# Altium PCB RM05-V1.7-sigle.PcbDoc
Units mm, origin at the board's own origin, x right, y up, seen from the top; angles counter-clockwise.
Board outline 152.4 x 101.6 mm, 2 copper layers (Top Layer, Bottom Layer); 42 components, 51 nets, 175 pads, 39 vias.
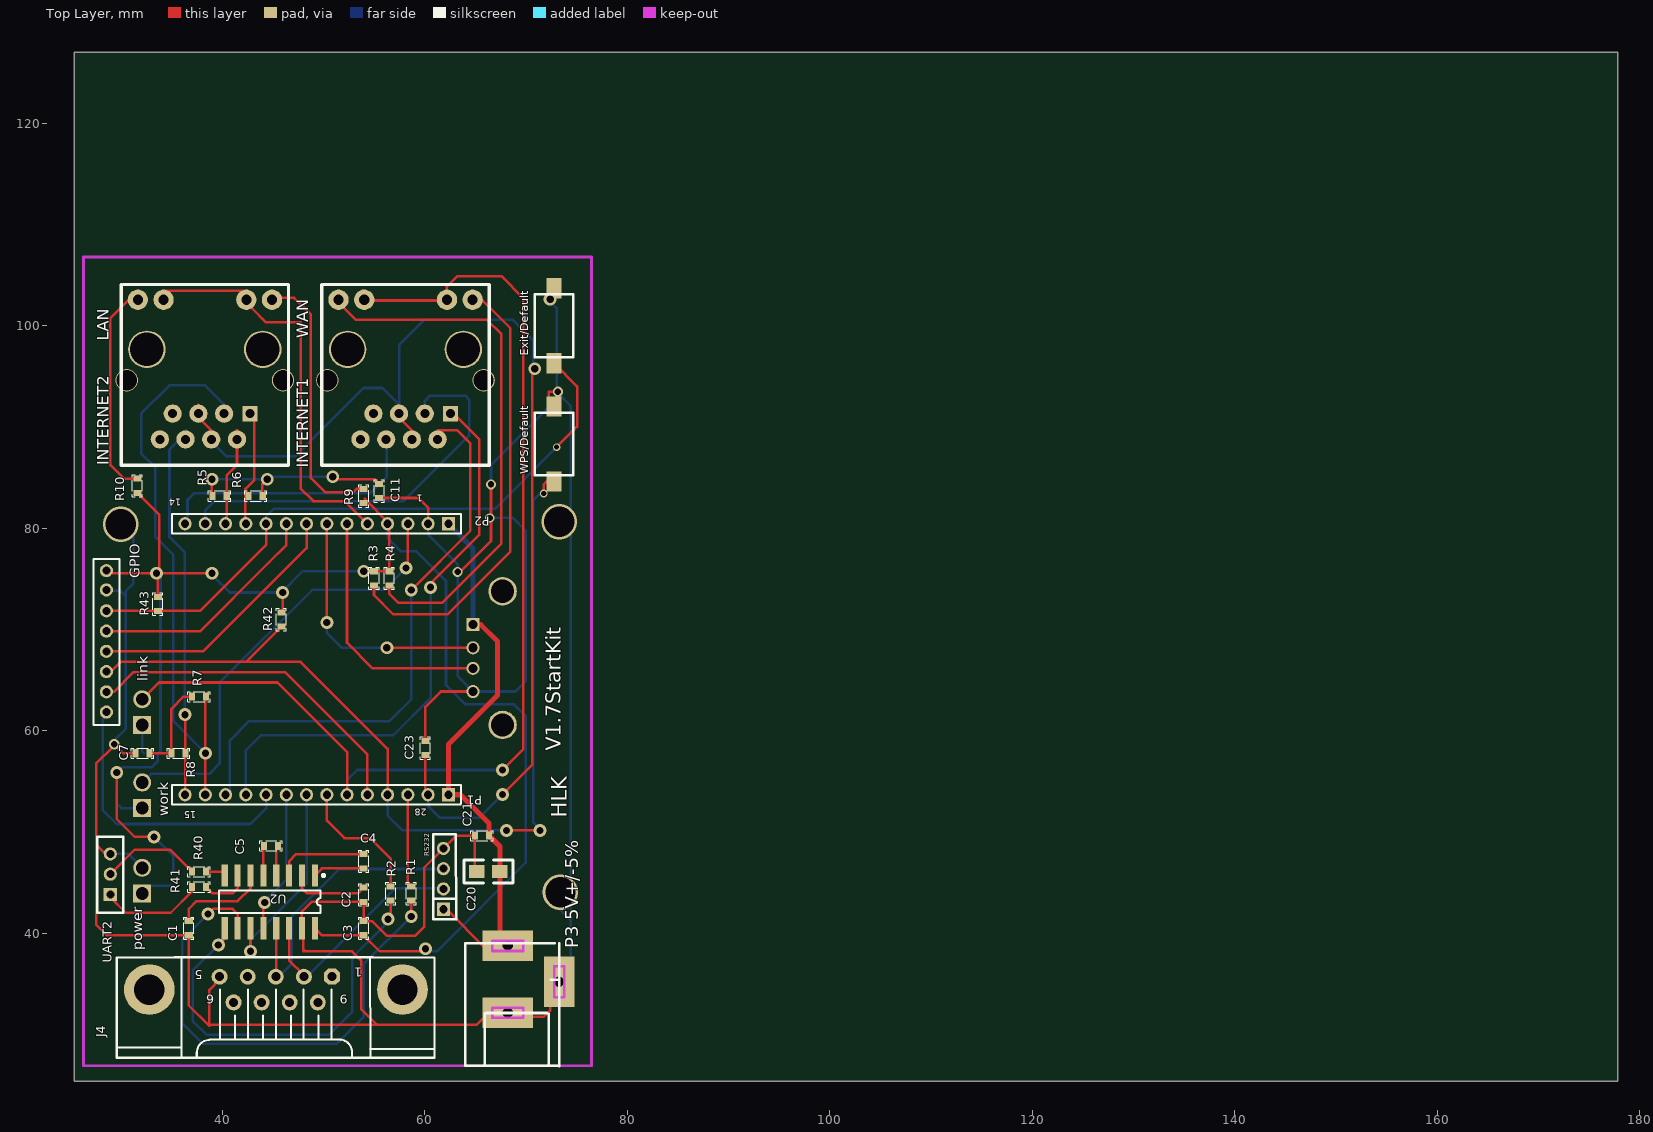
[diagram p0: Top Layer view]
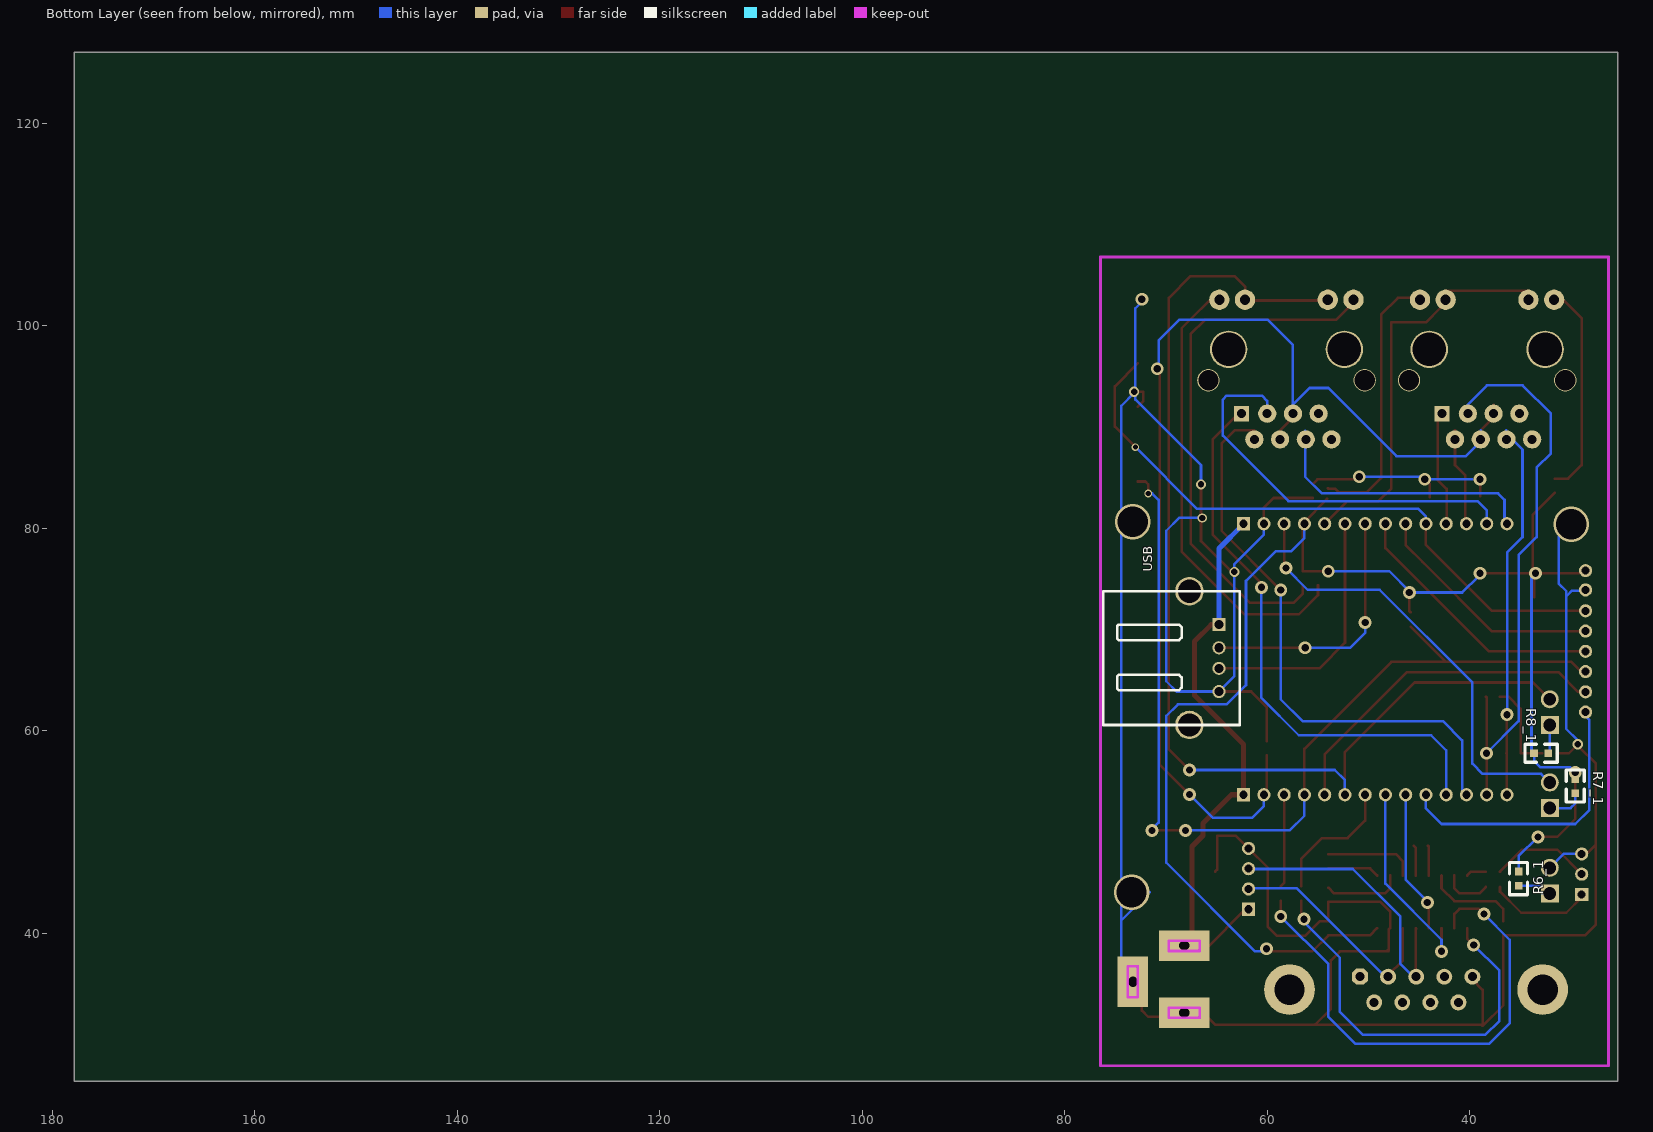
[diagram p1: Bottom Layer view, seen from below]

## Layer stack, top to bottom
Top Layer: signal copper 0.0356
Dielectric: dielectric 0.32, FR-4, Dk 4.8
Bottom Layer: signal copper 0.0356

## Board outline
25.4,25.4 177.8,25.4 177.8,127 25.4,127

## Design rules (kind name [scope] priority, off if disabled: settings)
Clearance [All] p1: gap=0.254
PolygonConnect [All] p1: connectstyle=Relief reliefconductorwidth=0.254 reliefentries=4 polygonreliefangle="90 Angle"
RoutingVias [All] p1: holewidth=0.711 width=1.27 viastyle="Through Hole" minholewidth=0.711 minwidth=1.27 maxholewidth=0.711 maxwidth=1.27
SilkscreenOverComponentPads [All] p1: minsilkscreentomaskgap=0.254
SolderMaskExpansion [All] p1: expansion=0.102
TestPointUsage [All] p1: valid=0 allowmultiple=FALSE
Testpoint [All] p1: side=15 testpointundercomponent=TRUE minsize=1.016 maxsize=2.54 preferedsize=1.524 minholesize=0 maxholesize=1.016 preferedholesize=0.813 testpointgrid=0.025 style=1023 order=0-112345678
Width [All] p1: maxlimit=0.5 minlimit=0.254 preferedwidth=0.254 toplayer_prefwidth=0.3 bottomlayer_prefwidth=0.3 minimp=50.000000 maximp=50.000000 favimp=50.000000
23 further rules are at their usual default settings.

## Classes and differential pairs
component class RM04-KIT: C1 C2 C3 C4 C5 C7 C11 C20 C21 C23 ENTERNET2 INTERNET1 "INTERNET1        WAN" "INTERNET2       LAN" J4 P1 P2 P3 "P3 5V+/-5%" R1 R2 R3 R4 R5 R6 R7 R8 R9 R10 U2 UART2 USB

## Components (designator, comment, footprint, x,y, rotation, side; value= is the part's Value field where it differs from the comment)
C1 "105" 0603#1 36.703,40.513 r90 top
C2 "105" 0603#1 53.975,43.815 r90 top
C3 "105" 0603#1 53.975,40.513 r270 top
C4 "105" 0603#1 53.975,47.117 r90 top
C5 "105" 0603#1 44.831,48.641 r180 top
C7 "0.01u" 0603#1 32.131,57.785 r0 top
C11 "0.01u" 0603#1 55.499,83.693 r90 top
C20 "10u" 0805 65.151,46.101 r0 top
C21 "0.01u" 0603#1 65.659,49.657 r0 top
C23 "0.01u" 0603#1 60.071,58.293 r270 top
Exit/Default "SW-PROG" SWITCH 72.771,96.901 r90 top
GPIO "Comment" HDR1X8 28.575,61.849 r90 top
"INTERNET1        WAN" "HR911105A" HR911105A 57.531,96.001 r90 top (schematic designator INTERNET1)
"INTERNET2       LAN" "HR911105A" HR911105A 37.719,96.001 r90 top (schematic designator ENTERNET2)
J4 "DB9" DB9S 39.751,35.721 r180 top
link "Comment" LED-0 32.107,61.846 r270 top
P1 "Header 14" H1*14-2.0 62.357,53.637 r180 top
P2 "Header 14" H1*14-2.0 62.357,80.391 r180 top
"P3 5V+/-5%" "Header 3" POWER_STK1 68.199,35.721 r90 top (schematic designator P3)
power "Comment" LED-0 32.107,45.203 r270 top
R1 "0" 0603#1 58.674,43.942 r90 top
R2 "0" 0603#1 56.642,43.942 r90 top
R3 "660" 0603#1 54.991,75.057 r270 top
R4 "660" 0603#1 56.515,75.057 r90 top
R5 "50" 0603#1 39.751,83.185 r180 top
R6 "50" 0603#1 43.307,83.185 r180 top
R6_1 "10K" 0603#2 35.179,46.101 r270 bottom
R7 "50" 0603#1 37.719,63.373 r180 top
R7_1 "10K" 0603#2 29.591,55.245 r270 bottom
R8 "50" 0603#1 35.687,57.785 r180 top
R8_1 "10K" 0603#2 33.655,57.785 r180 bottom
R9 "660" 0603#1 53.975,83.185 r90 top
R10 "660" 0603#1 31.623,84.201 r270 top
R40 "0" 0603#1 37.719,46.101 r0 top
R41 "0" 0603#1 37.719,44.577 r0 top
R42 "0" 0603#1 45.847,70.993 r270 top (schematic designator R1)
R43 "0" 0603#1 33.655,72.517 r90 top (schematic designator R1)
U2 "MAX232ACPE" MAX3232 39.751,44.577 r0 top
UART2 "Header 2" MHDR2 29.083,44.577 r90 top
USB "Header 4" USB-ACPT 64.643,66.929 r0 bottom
work "Comment" LED-0 32.107,53.633 r270 top
WPS/Default "SW-PROG" SWITCH 72.771,85.217 r90 top

## Footprints (in the part's own frame and the unit in brackets; to place one, negate y for a bottom-side part, rotate by r counter-clockwise, add the part's x,y. Pads: shape width x height; smd on the part's side, far side on the other; paste and mask are expansions set on the pad)
0603#1 [mm]
  rect 0.6x0.8 smd: 1(-0.7,0) 2(0.7,0)
  silkscreen extent -1.1,-0.5 1.1,0.5
0603#2 [mm]
  rect 0.762x0.762 smd: 1(0,0) 2(1.397,0)
  silkscreen extent -0.89,-0.89 2.29,0.89
0805 [mil]
  rect 60x50 smd: 1(-0.2,0.24) 2(89.8,0.24)
  silkscreen extent -50,-45 140,45
DB9S [mil]
  oct 62x62 hole 35: 1(-436.67,0)
  round 62 hole 35: 2(-327.5,0) 5(0,0) 6(-54.17,100) 7(-163.33,100) 8(-272.5,100) 9(-381.67,100)
  round 62.01 hole 35: 3(-218.35,0) 4(-109.17,0)
  round 196.67 hole 118.33: BO1(-710.83,50) BO2(273.33,50)
  silkscreen extent -835,-75 400,316
H1*14-2.0 [mm]
  rect 1.3x1.3 hole 0.8: 1(0.022,-0.054)
  round 1.3 hole 0.8: 2(2.022,-0.054) 3(4.022,-0.054) 4(6.022,-0.054) 5(8.022,-0.054) 6(10.022,-0.054) 7(12.022,-0.054) 8(14.022,-0.054) 9(16.022,-0.054) 10(18.022,-0.054) 11(20.022,-0.054) 12(22.022,-0.054) 13(24.022,-0.054) 14(26.022,-0.054)
  silkscreen extent -1.25,-1 27.32,0.9
HDR1X8 [mm] "Connector; Header; 8 Position"
  round 1.3 hole 0.8: 1(0,0) 2(2,0) 3(4,0) 4(6,0) 5(8,0) 6(10,0) 7(12.065,0) 8(13.97,0)
  silkscreen extent -1.27,-1.27 15.11,1.27
HR911105A [mm]
  rect 1.5x1.5 hole 0.889: 1(-4.684,-5.017)
  round 1.8 hole 0.889: 2(-7.224,-3.747) 3(-4.684,-2.477) 4(-7.224,-1.207) 5(-4.684,0.063) 6(-7.224,1.333) 7(-4.684,2.603) 8(-7.224,3.873)
  round 2 hole 1: 9(6.566,-7.207) 10.(6.566,-4.667) 11(6.566,3.503) 12(6.566,6.043)
  round 2.2 hole 2: ""(-1.384,7.143) ""(-1.384,-8.287)
  round 3.7 hole 3.302 unplated: ""(1.666,5.143) ""(1.666,-6.287)
  silkscreen extent -9.76,-8.83 8.06,7.68
LED-0 [mil] "Typical INFRARED GaAs LED; 2 Leads"
  rect 70x70 hole 50: 1(50,0)
  round 70 hole 50: 2(-50,0)
MAX3232 [mm]
  rect 0.6x2.2 smd: 1(9.398,1.136) 2(8.128,1.136) 3(6.858,1.136) 4(5.588,1.136) 5(4.318,1.136) 6(3.048,1.136) 7(1.778,1.136) 8(0.508,1.136) 9(0.508,-4.064) 10(1.778,-4.064) 11(3.048,-4.064) 12(4.318,-4.064) 13(5.588,-4.064) 14(6.858,-4.064) 15(8.128,-4.064) 16(9.398,-4.064)
  silkscreen extent -0.05,-2.56 10.37,1.26
MHDR2 [mm] "Connector; Header; 4 Position"
  rect 1.3x1.3 hole 0.8: 1(-0.73,0.127)
  round 1.3 hole 0.8: 2(1.27,0.127)
  silkscreen extent -2.54,-1.14 4.95,1.4
POWER_STK1 [mm]
  rect 3x5 hole 1: 1(3.075,0) 3(-3.556,0)
  rect 5x3 hole 1: 2(-0.5,-5.075)
  Keep-Out Layer lines w0.254: -4.064,1.524 -4.064,-1.524 -3.048,-1.524 -3.048,1.524 -4.064,1.524 ; 2.54,1.524 2.54,-1.524 3.556,-1.524 3.556,1.524 2.54,1.524 ; -2.032,-4.572 1.016,-4.572 1.016,-5.588 -2.032,-5.588 -2.032,-4.572
  silkscreen extent -8.81,-5.09 3.3,4.2
SWITCH [mm]
  rect 2x1.5 smd: 1(-0.6,0) 2(6.8,0)
  silkscreen extent 0,-1.9 6.2,1.9
USB-ACPT [mil]
  rect 51.18x51.18 hole 35.5: 1(5,-140)
  round 51.18 hole 35.5: 2(5,-50) 3(5,30) 4(5,120)
  round 110.67 hole 90 unplated: ""(120,-270) ""(120,250)
  silkscreen extent -75,-270 455,250

## Part data
C1 C2 C3 C4 C5: library part Cap, "Capacitor"
C7 C11 C20 C21 C23: library part CAP, "Capacitor"
J4: library part CON9, "Connector"
P1 P2: "Header, 14-Pin"
"P3 5V+/-5%": "Header, 3-Pin"
R1 R2 R3 R4 R5 R6 R7 R8 R9 R10 R40 R41 R42 R43: library part RES2
U2: "+5V Powered, Multi-Channel RS-232 Driver/Receiver"
UART2: "Header, 2-Pin"
USB: "Header, 4-Pin"

## Free pads (board coordinates)
  round 1.3 hole 0.8: 0(28.956,47.847) 6(61.849,44.387) 7(61.849,46.387) 8(61.849,48.387)
  rect 1.3x1.3 hole 0.8: 5(61.849,42.387)

## Via types
v1: diameter 1.27, hole 0.711, Top Layer to Bottom Layer, 29 vias
v2: diameter 1.016, hole 0.635, Top Layer to Bottom Layer, 4 vias
v3: diameter 3.5, hole 3, Top Layer to Bottom Layer, 3 vias
v4: diameter 0.762, hole 0.508, Top Layer to Bottom Layer, 2 vias
v5: diameter 0.9, hole 0.6, Top Layer to Bottom Layer, 1 vias

## Nets (pads, with @x,y where several pads share a name; then routed paths per layer and width w, separated by ;. In a path a pad name is that pad's centre, name@x,y a point inside that pad or via, vN(x,y) a via of type N, cw(c..) or ccw(c..) an arc to the next point about the centre after c; other vN are vias at no path point)
3.3VD: C3.2 GPIO.8 P2.4 R3.1 R4.2 R6_1.1 R7_1.1 R8_1.1 R9.1 R10.2 R42.1 R43.2 U2.16 | length 154.7
  Top Layer w0.254: 29.21,75.565 33.274,75.565 33.782,76.073 33.782,81.342 R10.2 ; v1(29.591,55.88) 29.591,51.308 31.369,49.53 v1(33.274,49.53) ; v1(33.528,75.565) v1(38.989,75.565) ; R43.2 v1@33.655,75.438 ; R42.1 45.974,71.82 v1(45.974,73.66) ; U2.16 49.849,39.813 C3.2 55.561,38.227 v1@59.944,38.227 ; v1(53.975,75.757) R3.1 R4.2 56.515,80.265 P2.4 56.335,80.633 54.197,82.771 54.102,82.931
  Bottom Layer w0.254: v1(29.591,55.88) 30.099,56.388 33.02,56.388 33.655,57.023 R8_1.1 33.909,58.039 33.909,75.184 v1(33.528,75.565) ; v1(33.274,49.53) 35.179,47.625 R6_1.1 ; v1@39.116,75.311 40.767,73.66 v1(45.974,73.66) ; v1@45.91,73.724 47.944,75.757 v1(53.975,75.757) ; P2.4 56.335,79.047 57.658,77.724 59.182,77.724 62.103,74.803 62.103,64.516 64.008,62.611 68.834,62.611 69.977,61.468 69.977,46.99 61.214,38.227 v1@59.944,38.227
  other v1: 60.071,38.481
CTS_N: GPIO.2 P1.5 | length 33.2
  Top Layer w0.254: 29.305,63.849 31.242,65.786 46.228,65.786 54.335,57.679 P1.5
GND: "P3 5V+/-5%.2" "P3 5V+/-5%.3" C1.1 C2.1 C3.1 C7.1 C11.1 C20.1 C21.1 C23.1 Exit/Default.2 GPIO.7 J4.5 P2.2 pad.0 pad.8 power.2 U2.15 USB.4 WPS/Default.2 | length 319.8
  Top Layer w0.254: pad.0 28.48,47.847 27.559,48.768 ; v2@29.21,58.42 27.559,56.769 27.559,48.768 ; v2(29.337,58.674) 30.226,57.785 C7.1 ; J4.5@39.751,35.433 38.735,34.417 38.735,30.861 ; 48.006,38.735 48.006,38.481 48.218,38.269 48.006,38.269 ; 55.266,31.009 53.721,32.554 53.721,37.338 52.832,38.227 48.048,38.227 48.006,38.269 ; C11.1 55.626,82.993 59.374,82.993 60.335,82.032 P2.2 ; C23.1 60.071,62.357 61.595,63.881 USB.4 ; v2@63.373,75.819 63.627,75.819 66.548,78.74 v2(66.548,84.328) ; C20.1 64.959,46.294 C21.1 63.119,49.657 pad.8 59.944,46.482 59.944,40.64 59.055,39.751 56.261,39.751 54.799,41.213 C3.1 C2.1 48.83,43.115 47.879,42.164 U2.15 48.006,40.386 48.006,38.269 ; 66.675,31.877 67.691,31.877 ; 66.929,31.623 69.171,31.623 68.918,31.877 ; 68.326,31.877 67.691,31.877 ; 72.766,34.933 72.39,34.557 72.39,32.385 71.755,31.75 67.818,31.75 67.691,31.877 ; WPS/Default.2 72.263,92.525 72.263,93.472 v2(73.152,93.472) ; 27.559,48.768 27.559,40.894 28.64,39.813 C1.1 36.703,32.893 38.735,30.861 ; 38.735,30.861 38.862,30.988 65.151,30.988 66.04,31.877 67.691,31.877
  Bottom Layer w0.254: pad.0 30.733,47.847 power.2 ; GPIO.7@29.083,73.849 29.91,73.849 30.48,73.279 ; v2(29.337,58.674) 29.337,59.055 30.48,60.198 30.48,72.771 30.48,73.279 ; v3(29.972,80.391) 31.242,79.121 31.242,74.549 30.48,73.787 30.48,73.279 ; P2.2 60.335,79.365 63.246,76.454 v2(63.246,75.692) ; v2@63.246,75.946 v2(63.246,75.692) ; v5(66.421,81.026) 68.707,81.026 69.977,79.756 69.977,64.897 68.961,63.881 USB.4 63.246,65.405 v2(63.246,75.692) ; v2(66.548,84.328) 66.548,86.233 73.025,92.71 73.025,101.727 v1@72.263,102.489 ; 71.628,44.069 74.422,41.275 ; v2@73.152,93.726 v2(73.152,93.472) 73.152,93.345 74.422,92.075 74.422,41.275 ; 74.295,36.322 74.422,36.449 74.422,41.275
  other v1: 72.39,102.616
  other v3: 73.406,44.069 73.279,80.645
GPIO0: Exit/Default.1 GPIO.6 P2.10 R43.1 | length 62.4
  Top Layer w0.254: GPIO.6@29.083,71.849 37.813,71.849 44.335,78.371 P2.10 ; Exit/Default.1 75.057,94.015 75.057,90.043 v4(73.025,88.011)
  Bottom Layer w0.254: P2.10@44.323,80.457 P2.10 44.335,81.165 45.085,81.915 66.929,81.915 v4(73.025,88.011)
I2C_CLK: GPIO.5 P2.9 | length 23.1
  Top Layer w0.254: GPIO.5@29.083,69.85 37.846,69.85 44.543,76.547 ; 44.684,76.688 44.543,76.547 ; P2.9 46.335,78.339 44.543,76.547
I2C_SD: GPIO.4 P2.8 | length 25.9
  Top Layer w0.254: GPIO.4@29.083,67.849 38.131,67.849 48.335,78.053 P2.8
led_s1: power.1 R6_1.2 | length 3.4
  Bottom Layer w0.254: power.1 32.878,44.704 R6_1.2
led_s2: R7_1.2 work.1 | length 3.7
  Bottom Layer w0.254: R7_1.2 29.591,52.832 30.06,52.363 work.1
led_s3: link.1 R8_1.2 | length 2.9
  Bottom Layer w0.254: link.1 32.107,57.936 R8_1.2
LINK3: "INTERNET2       LAN.10." "INTERNET2       LAN.11" P2.5 | length 40
  Top Layer w0.254: 34.216,103.467 42.386,103.467 42.926,102.927 42.926,101.727 44.323,100.33 47.752,100.33 47.752,83.947 49.022,82.677 52.103,82.677 P2.5
LINK4: "INTERNET1        WAN.10." "INTERNET1        WAN.11" link.2 P1.6 | length 112.2
  Top Layer w0.254: link.2 33.761,64.77 45.466,64.77 52.335,57.901 P1.6 ; 53.34,102.997 53.81,103.467 54.028,103.467 55.006,102.489 61.976,102.489 62.126,102.639 ; 62.198,102.567 62.198,103.854 63.246,104.902 66.04,104.902 67.564,104.902 69.723,102.743 69.723,58.166 v1(67.691,56.134)
  Bottom Layer w0.254: P1.6 52.335,55.129 53.34,56.134 v1(67.691,56.134)
LK_led: 
NetC1_2: C1.2 U2.6 | length 9.4
  Top Layer w0.254: C1.2 36.703,42.418 37.465,43.18 41.529,43.18 42.799,44.45 U2.6
NetC2_2: C2.2 U2.2 | length 7.8
  Top Layer w0.254: U2.2 47.879,44.45 48.387,43.942 53.402,43.942 C2.2
NetC4_1: C4.1 U2.1 | length 5.1
  Top Layer w0.254: U2.1 49.853,46.417 C4.1
NetC4_2: C4.2 U2.3 | length 9.1
  Top Layer w0.254: U2.3 46.609,47.117 47.309,47.817 C4.2
NetC5_1: C5.1 U2.4 | length 3
  Top Layer w0.254: U2.4 45.339,48.449 C5.1
NetC5_2: C5.2 U2.5 | length 3
  Top Layer w0.254: U2.5 44.069,48.579 C5.2
NetC7_2: C7.2 R7.2 R8.2 | length 9.1
  Top Layer w0.254: C7.2 R8.2 34.987,62.165 36.195,63.373 R7.2
NetC11_2: C11.2 R5.2 R6.1 | length 18.6
  Top Layer w0.254: R5.2@38.989,83.185 v1@38.989,84.517 ; R6.1@43.942,83.058 43.942,84.393 ; v1@51.181,84.836 55.056,84.836 C11.2
  Bottom Layer w0.254: v1(38.989,84.836) v1@38.989,84.963 ; 39.751,84.836 v1(44.45,84.836) 44.704,84.836 44.958,85.09 v1(50.927,85.09)
NetENTERNET2_9: "INTERNET2       LAN.9" R9.2 | length 26.9
  Top Layer w0.254: 44.926,103.467 45.65,102.743 47.117,102.743 48.768,101.092 48.768,84.963 50.165,83.566 52.959,83.566 53.276,83.883 53.278,83.885 R9.2 ; R9.2@53.975,83.947 R9.2@54.037,83.947
NetENTERNET2_12: "INTERNET2       LAN.12" R10.1 | length 21.6
  Top Layer w0.254: R10.1 30.288,84.901 28.956,86.233 28.956,100.747 31.676,103.467
NetINTERNET1_9: "INTERNET1        WAN.9" R3.2 | length 45.1
  Top Layer w0.254: R3.2 54.991,73.406 56.896,71.501 62.23,71.501 68.453,77.724 68.453,99.752 64.738,103.467
NetINTERNET1_12: "INTERNET1        WAN.12" R4.1 | length 53.9
  Top Layer w0.254: 51.488,103.467 51.943,103.012 51.943,101.854 53.213,100.584 66.167,100.584 67.564,99.187 67.564,78.486 61.722,72.644 57.404,72.644 56.515,73.533 R4.1
NetR1_1: R1.1 U2.10 | length 50.4
  Top Layer w0.254: v1(38.608,41.91) 39.116,42.418 41.021,42.418 41.529,41.91 U2.10 ; v1(58.674,41.656) R1.1
  Bottom Layer w0.254: v1(38.608,41.91) 36.068,39.37 36.068,31.115 38.1,29.083 51.308,29.083 53.975,31.75 53.975,36.957 v1(58.674,41.656) v1@58.674,42.164
NetR2_1: R2.1 U2.9 | length 39.6
  Top Layer w0.254: v1(39.624,38.862) 40.259,39.497 U2.9 ; v1@56.515,41.656 56.642,41.783 R2.1
  Bottom Layer w0.254: v1(39.624,38.862) 37.084,36.322 37.084,31.369 38.481,29.972 50.546,29.972 52.832,32.258 52.832,37.592 v1@56.325,41.084
  other v1: 56.388,41.402
NetR40_1: R40.1 UART2.2 | length 10.3
  Top Layer w0.254: UART2.2@29.21,46.101 UART2.2 31.369,48.26 34.86,48.26 R40.1
NetR40_2: R40.2 U2.8 | length 2
  Top Layer w0.254: R40.2 39.871,46.101 U2.8
NetR41_1: R41.1 UART2.1 | length 10.5
  Top Layer w0.254: UART2.1@28.956,43.307 UART2.1@28.956,43.561 ; UART2.1 UART2.1@28.956,43.561 ; R41.1 37.019,44.131 34.925,42.037 30.48,42.037 UART2.1@28.956,43.561
NetR41_2: R41.2 U2.7 | length 4.8
  Top Layer w0.254: R41.2 39.054,43.942 41.021,43.942 41.529,44.45 U2.7
RIN: GPIO.3 P1.4 R42.2 WPS/Default.1 | length 94.5
  Top Layer w0.254: GPIO.3@29.019,65.849 29.972,66.802 42.356,66.802 ; R42.2 42.356,66.802 ; P1.4 56.335,58.219 47.752,66.802 42.356,66.802 ; v1@68.199,50.165 v1(71.374,50.165) ; v4(71.755,83.439) 71.755,84.328 72.044,84.617 WPS/Default.1
  Bottom Layer w0.254: P1.4 56.335,51.615 57.785,50.165 v1(68.072,50.165) ; v1@71.438,50.228 70.739,50.927 70.739,82.804 71.374,83.439 v4(71.755,83.439)
RTS_N: GPIO.1 P1.10 | length 28.8
  Bottom Layer w0.254: GPIO.1@29.083,61.849 28.956,61.849 28.194,61.087 28.194,52.197 29.591,50.8 42.799,50.8 44.335,52.336 P1.10
RX: J4.3 pad.7 U2.13 | length 28.5
  Top Layer w0.254: J4.3@45.297,35.433 45.339,35.475 U2.13 U2.13@45.297,40.471
  Bottom Layer w0.254: J4.3@45.297,35.433 46.863,36.999 46.863,41.656 51.562,46.355 pad.7@61.341,46.355
RXD: P1.7 R2.2 | length 13.1
  Top Layer w0.254: P1.7 50.335,51.138 52.07,49.403 54.61,49.403 56.642,47.371 R2.2
RXIN3: "INTERNET2       LAN.6" P1.14 R8.1 | length 37.7
  Top Layer w0.254: v1(36.322,61.595) 36.335,61.582 R8.1@36.335,57.733 ; P1.14 R8.1@36.335,57.733 ; R8.1 R8.1@36.335,57.733
  Bottom Layer w0.254: v1@36.322,61.214 v1(36.322,61.595) 36.322,77.597 34.798,79.121 34.798,87.757 36.386,89.345 36.386,89.677
RXIN4: "INTERNET1        WAN.6" P2.14 | length 27.6
  Bottom Layer w0.254: P2.14 36.576,80.686 36.576,82.804 37.211,83.439 54.61,83.439 56.261,85.09 56.261,89.614
RXIP3: "INTERNET2       LAN.3" P1.13 R7.1 | length 56
  Top Layer w0.254: P1.13 38.335,63.289 R7.1
  Bottom Layer w0.254: v1(38.354,57.785) 35.179,60.96 35.179,77.343 33.401,79.121 33.401,85.979 32.004,87.376 32.004,91.313 34.798,94.107 38.306,94.107 40.196,92.217
RXIP4: "INTERNET1        WAN.3" P2.13 | length 40
  Bottom Layer w0.254: P2.13 38.335,81.788 39.224,82.677 57.912,82.677 64.389,89.154 64.389,92.71 64.008,93.091 60.516,93.091 60.008,92.583 60.008,91.317
TX: J4.2 pad.6 U2.14 | length 22.9
  Top Layer w0.254: U2.14 46.609,37.338 48.07,35.877 J4.2@48.07,35.433
  Bottom Layer w0.254: J4.2@48.07,35.433 57.086,44.45 pad.6@61.595,44.45
TXD: P1.3 R1.2 | length 9.2
  Top Layer w0.254: P1.3 58.335,44.981 R1.2
TXON3: "INTERNET2       LAN.2" P2.12 R5.1 | length 9.7
  Top Layer w0.254: P2.12 40.451,80.561 40.451,84.201 40.451,85.217 41.466,86.232 41.466,89.677
TXON4: "INTERNET1        WAN.2" P1.12 | length 56.9
  Top Layer w0.254: v1@58.42,73.914 v1(58.674,73.914) 64.516,79.756 64.516,88.392 63.231,89.677 61.278,89.677
  Bottom Layer w0.254: P1.12 40.767,54.123 40.767,59.055 42.672,60.96 56.515,60.96 58.674,63.119 v1(58.674,73.914)
TXOP3: "INTERNET2       LAN.1" P2.11 R6.2 | length 11.7
  Top Layer w0.254: P2.11 42.291,80.489 42.291,83.885 43.18,84.774 43.18,91.773
TXOP4: "INTERNET1        WAN.1" P1.11 | length 56.4
  Top Layer w0.254: v1@60.579,74.549 65.405,79.375 65.405,88.773 62.254,91.924
  Bottom Layer w0.254: P1.11 42.335,58.083 43.815,59.563 56.896,59.563 60.579,63.246 v1(60.579,74.168)
UART_RX: P1.9 U2.12 | length 14.2
  Top Layer w0.254: U2.12 44.069,42.926 v1(44.196,43.053)
  Bottom Layer w0.254: v1@44.069,43.053 46.335,45.319 P1.9
UART_TX: P1.8 U2.11 | length 19.8
  Top Layer w0.254: v1(42.799,38.227) U2.11
  Bottom Layer w0.254: v1@42.799,38.481 42.799,39.37 48.335,44.906 P1.8
USB_M: P2.7 USB.2 | length 26.3
  Top Layer w0.254: P2.7 v1(50.335,70.696) v1@50.419,70.612 ; v1(56.261,68.199) USB.2 USB.2@64.516,68.453
  Bottom Layer w0.254: v1(50.335,70.696) 50.335,69.68 51.816,68.199 v1(56.261,68.199)
USB_P: P2.6 USB.3 | length 25.2
  Top Layer w0.254: P2.6 52.324,80.434 52.324,68.707 54.864,66.167 USB.3
VDD_1.8V: "INTERNET1        WAN.4" "INTERNET1        WAN.5" "INTERNET2       LAN.4" "INTERNET2       LAN.5" C23.2 P1.2 | length 111.7
  Top Layer w0.254: 37.656,92.217 37.656,91.317 37.656,90.947 38.926,89.677 38.926,88.777 ; 57.404,92.153 57.404,91.011 58.738,89.677 ; C23.2 60.071,53.955 P1.2 ; v1(67.691,53.721) 70.612,56.642 v1@70.612,95.758
  Bottom Layer w0.254: 38.926,89.677 38.926,88.582 40.386,87.122 47.244,87.122 53.975,93.853 55.832,93.853 57.468,92.217 57.468,98.108 59.944,100.584 68.707,100.584 70.739,98.552 70.739,95.885 v1(70.866,95.758) ; P1.2 60.335,52.568 61.468,51.435 65.405,51.435 v1(67.691,53.721)
VDD_5V: "P3 5V+/-5%.1" C20.2 C21.2 P1.1 P2.1 pad.5 USB.1 | length 56.7
  Top Layer w0.254: pad.5 62.134,42.387 66.013,38.508 67.691,38.508 66.775,38.508 ; USB.1 65.532,70.485 ; 67.432,39.756 67.691,39.497
  Top Layer w0.5: 65.532,70.485 67.183,68.834 67.183,63.5 62.335,58.652 P1.1 63.53,53.691 66.359,50.862 C21.2 67.432,48.584 C20.2 67.432,39.756
  Bottom Layer w0.5: P2.1 64.77,78.01 USB.1
WR_led: P2.3 work.2 | length 44.1
  Top Layer w0.254: v1@58.039,75.946 v1(58.167,76.074) 58.335,76.242 P2.3
  Bottom Layer w0.254: work.2 32.957,55.753 38.735,55.753 39.751,56.769 39.751,64.77 48.895,73.914 56.007,73.914 v1(58.167,76.074)
pads on no net: "INTERNET1        WAN.7" "INTERNET1        WAN.8" "INTERNET1        WAN." "INTERNET2       LAN.7" "INTERNET2       LAN.8" "INTERNET2       LAN." J4.1 J4.4 J4.6 J4.7 J4.8 J4.9 J4.BO1 J4.BO2 USB.

## Keep-outs
Keep-Out Layer:
  lines w0.254: 26.307,26.944 32.131,26.944 ; 26.307,27.011 26.307,28.772 ; 26.307,28.369 26.307,49.589 ; 26.307,49.759 26.307,101.067 ; 26.307,100.428 26.307,106.658 ; 26.307,106.827 32.131,106.827 ; 26.335,106.746 26.809,106.746 ; 26.769,106.75 31.821,106.75 ; 31.578,26.944 76.468,26.944 76.468,28.357 76.453,28.373 ; 31.578,106.827 76.468,106.827 ; 31.754,106.742 76.469,106.742 76.469,104.148 ; 76.472,27.011 76.472,28.772 ; 76.472,28.369 76.472,49.589 ; 76.471,28.371 76.471,104.447 ; 76.472,49.759 76.472,101.067 ; 76.472,100.428 76.472,106.658

## Silkscreen, mask and mechanical layers (free items; w line width, h text height)
Top Overlay:
  lines w0.254: 27.686,49.53 30.226,49.53 ; 60.96,43.434 62.992,43.434 ; 60.828,41.402 63.108,41.402 63.058,49.784 60.836,49.784 60.828,41.402
  text "1" at 59.817,83.312 h0.7 r180
  text "14" at 35.941,82.931 h0.7 r180
  text "V1.7StartKit" at 73.914,58.039 h2.52 r90
  text "28" at 60.198,52.324 h0.7 r180
  text "15" at 37.465,52.07 h0.7 r180
  text "HLK" at 74.041,51.435 h1.52 r90
  text "RS232" at 60.452,47.625 h0.51 r90

## Text inside footprints (layer, text, board x,y; h text height)
J4: Top Overlay "9" at 52.409,33.943 h0.89 r180; Top Overlay "5" at 38.1,36.356 h0.89 r180; Top Overlay "1" at 53.848,36.61 h0.89 r180; Top Overlay "6" at 39.201,33.943 h0.89 r180